# EAGLE board Papilio-Audio_Wing-Panel-v10 (EAGLE 6.3)
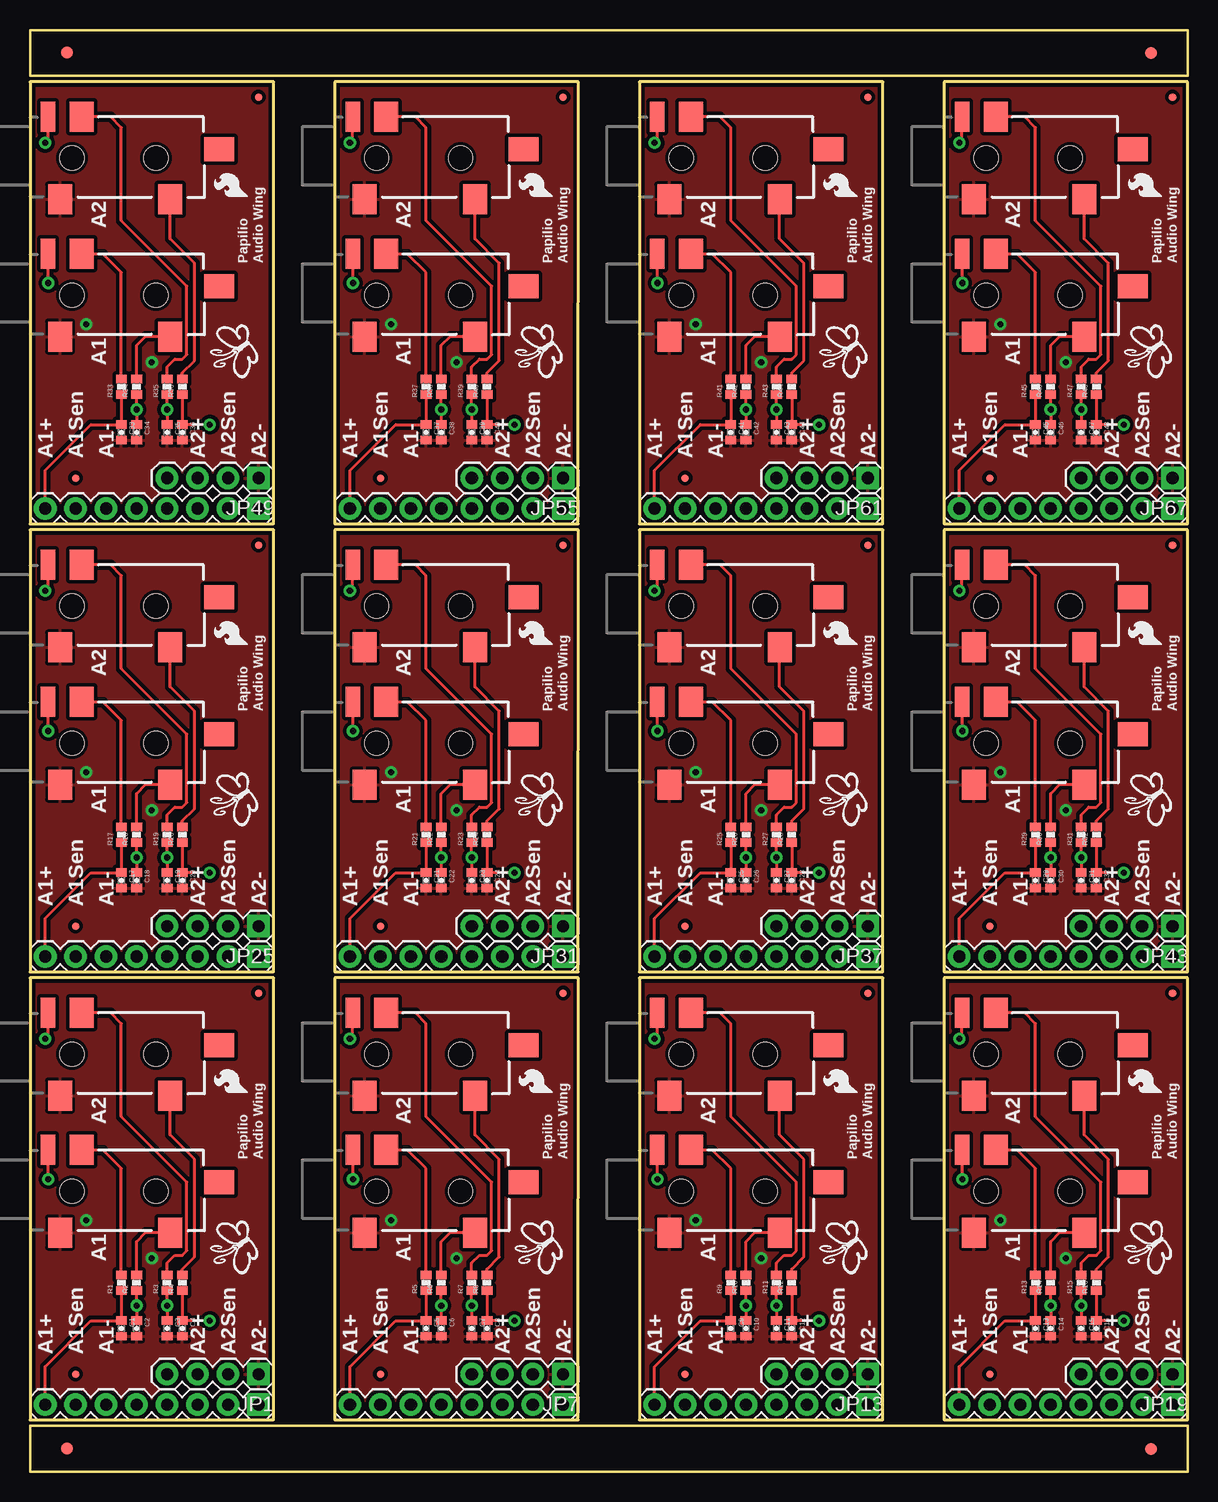
[diagram p0: board, top side]
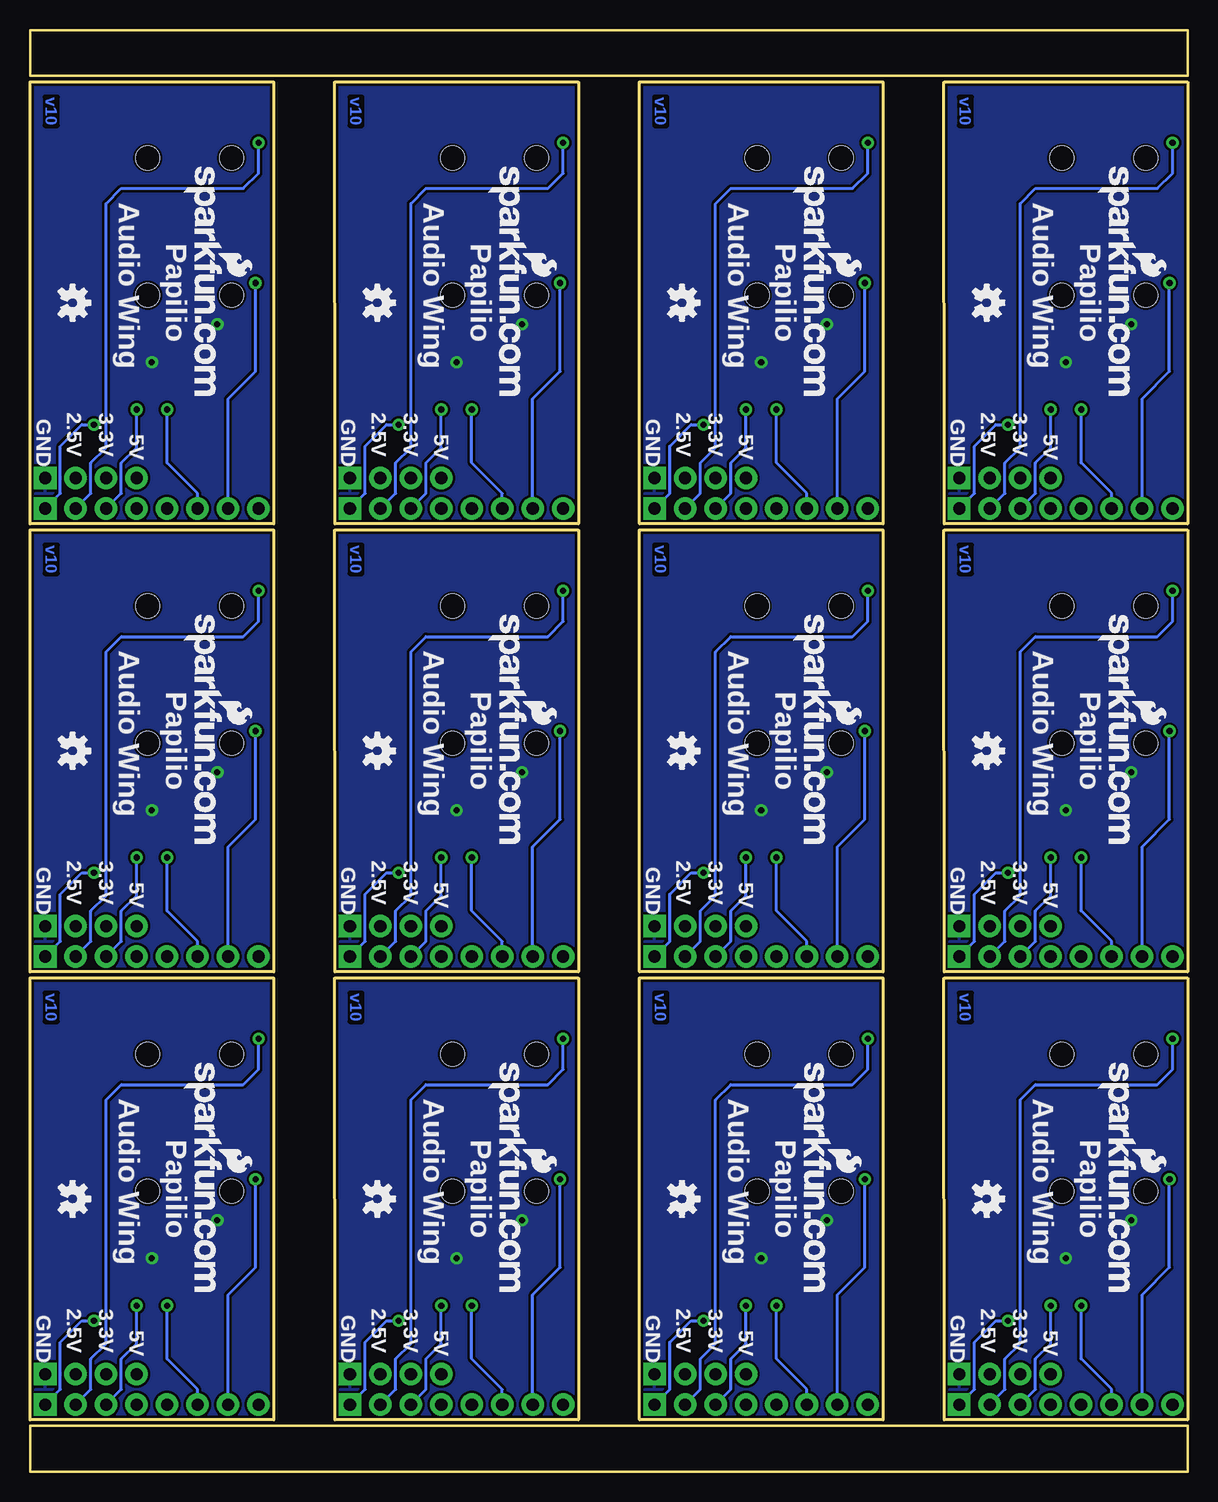
[diagram p1: board, bottom side, seen from below]

Size 96.52 x 120.14 mm. Coordinates in mm from the lower left corner, seen from the top.
Outline: 93.98,3.81 74.93,3.81
Outline: 74.93,3.81 7.62,3.81
Outline: 74.93,3.81 96.52,3.81 96.52,0 73.66,0
Outline: 2.54,0 21.59,0
Outline: 21.59,0 88.9,0
Outline: 21.59,0 0,0 0,3.81 22.86,3.81
Outline: 93.98,120.14 74.93,120.14
Outline: 74.93,120.14 7.62,120.14
Outline: 74.93,120.14 96.52,120.14 96.52,116.33 73.66,116.33
Outline: 2.54,116.33 21.59,116.33
Outline: 21.59,116.33 88.9,116.33
Outline: 21.59,116.33 0,116.33 0,120.14 22.86,120.14
Outline: 0,4.32 20.3,4.32 20.32,41.15 0,41.15 0,4.32
Outline: 25.4,4.32 45.7,4.32 45.72,41.15 25.4,41.15 25.4,4.32
Outline: 50.8,4.32 71.1,4.32 71.12,41.15 50.8,41.15 50.8,4.32
Outline: 76.2,4.32 96.5,4.32 96.52,41.15 76.2,41.15 76.2,4.32
Outline: 0,41.66 20.3,41.66 20.32,78.49 0,78.49 0,41.66
Outline: 25.4,41.66 45.7,41.66 45.72,78.49 25.4,78.49 25.4,41.66
Outline: 50.8,41.66 71.1,41.66 71.12,78.49 50.8,78.49 50.8,41.66
Outline: 76.2,41.66 96.5,41.66 96.52,78.49 76.2,78.49 76.2,41.66
Outline: 0,78.99 20.3,78.99 20.32,115.82 0,115.82 0,78.99
Outline: 25.4,78.99 45.7,78.99 45.72,115.82 25.4,115.82 25.4,78.99
Outline: 50.8,78.99 71.1,78.99 71.12,115.82 50.8,115.82 50.8,78.99
Outline: 76.2,78.99 96.5,78.99 96.52,115.82 76.2,115.82 76.2,78.99
Copper layers (1*16): Top 0.035mm / dielectric 1.5mm / Bottom 0.035mm
Design rules "default": minimum track width 8mil, minimum drill 20mil, track to track 8mil, track to pad 8mil, pad to pad 8mil, via to via 8mil, smd to smd 8mil, copper to edge 8mil, drill to drill 8mil, minimum pad ring 12mil, minimum via ring 10mil, stop-mask expansion 4mil, vias tented up to drill 20mil, thermal gap 10mil

## Footprints (pad centres in the part's own frame; a part is rotated, then mirrored left to right if it is on the bottom)
AUDIO-JACK-3.5MM-SMD = smd 2 x 2.5: RING 4.3,3.45; SLEEVE 2.5,-3.45; TIP 11.7,-3.45 | smd 1.2 x 2.5: RSH 1.5,3.45 | smd 2.5 x 2: TSH 15.75,0.75 | hole 2: 3.5,0; 10.5,0
0402-CAP = smd 0.7 x 0.9: 1 -0.65,0; 2 0.65,0
FIDUCIAL-1X2 = smd 1 x 1: 1 0,0
1X04 = drill 1.016 pad 1.88 square: 1 0,0 | drill 1.016 pad 1.88: 2 2.54,0; 3 5.08,0; 4 7.62,0
1X08 = drill 1.016 pad 1.88 square: 1 0,0 | drill 1.016 pad 1.88: 2 2.54,0; 3 5.08,0; 4 7.62,0; 5 10.16,0; 6 12.7,0; 7 15.24,0; 8 17.78,0
MICRO-FIDUCIAL = smd 0.635 x 0.635: 1 0,0
0402-RES = smd 0.7 x 0.9: 1 -0.65,0; 2 0.65,0

## Placement (x,y rotation side)
AJ1  AUDIO-JACK2SMD  [AUDIO-JACK-3.5MM-SMD]  0,23.37 0 top
AJ2  AUDIO-JACK2SMD  [AUDIO-JACK-3.5MM-SMD]  0,34.8 0 top
AJ3  AUDIO-JACK2SMD  [AUDIO-JACK-3.5MM-SMD]  25.4,23.37 0 top
AJ4  AUDIO-JACK2SMD  [AUDIO-JACK-3.5MM-SMD]  25.4,34.8 0 top
AJ5  AUDIO-JACK2SMD  [AUDIO-JACK-3.5MM-SMD]  50.8,23.37 0 top
AJ6  AUDIO-JACK2SMD  [AUDIO-JACK-3.5MM-SMD]  50.8,34.8 0 top
AJ7  AUDIO-JACK2SMD  [AUDIO-JACK-3.5MM-SMD]  76.2,23.37 0 top
AJ8  AUDIO-JACK2SMD  [AUDIO-JACK-3.5MM-SMD]  76.2,34.8 0 top
AJ9  AUDIO-JACK2SMD  [AUDIO-JACK-3.5MM-SMD]  0,60.71 0 top
AJ10  AUDIO-JACK2SMD  [AUDIO-JACK-3.5MM-SMD]  0,72.14 0 top
AJ11  AUDIO-JACK2SMD  [AUDIO-JACK-3.5MM-SMD]  25.4,60.71 0 top
AJ12  AUDIO-JACK2SMD  [AUDIO-JACK-3.5MM-SMD]  25.4,72.14 0 top
AJ13  AUDIO-JACK2SMD  [AUDIO-JACK-3.5MM-SMD]  50.8,60.71 0 top
AJ14  AUDIO-JACK2SMD  [AUDIO-JACK-3.5MM-SMD]  50.8,72.14 0 top
AJ15  AUDIO-JACK2SMD  [AUDIO-JACK-3.5MM-SMD]  76.2,60.71 0 top
AJ16  AUDIO-JACK2SMD  [AUDIO-JACK-3.5MM-SMD]  76.2,72.14 0 top
AJ17  AUDIO-JACK2SMD  [AUDIO-JACK-3.5MM-SMD]  0,98.04 0 top
AJ18  AUDIO-JACK2SMD  [AUDIO-JACK-3.5MM-SMD]  0,109.47 0 top
AJ19  AUDIO-JACK2SMD  [AUDIO-JACK-3.5MM-SMD]  25.4,98.04 0 top
AJ20  AUDIO-JACK2SMD  [AUDIO-JACK-3.5MM-SMD]  25.4,109.47 0 top
AJ21  AUDIO-JACK2SMD  [AUDIO-JACK-3.5MM-SMD]  50.8,98.04 0 top
AJ22  AUDIO-JACK2SMD  [AUDIO-JACK-3.5MM-SMD]  50.8,109.47 0 top
AJ23  AUDIO-JACK2SMD  [AUDIO-JACK-3.5MM-SMD]  76.2,98.04 0 top
AJ24  AUDIO-JACK2SMD  [AUDIO-JACK-3.5MM-SMD]  76.2,109.47 0 top
C1  4.7nF  [0402-CAP]  7.62,11.94 270 top
C2  4.7nF  [0402-CAP]  8.89,11.94 270 top
C3  4.7nF  [0402-CAP]  11.43,11.94 270 top
C4  4.7nF  [0402-CAP]  12.7,11.94 270 top
C5  4.7nF  [0402-CAP]  33.02,11.94 270 top
C6  4.7nF  [0402-CAP]  34.29,11.94 270 top
C7  4.7nF  [0402-CAP]  36.83,11.94 270 top
C8  4.7nF  [0402-CAP]  38.1,11.94 270 top
C9  4.7nF  [0402-CAP]  58.42,11.94 270 top
C10  4.7nF  [0402-CAP]  59.69,11.94 270 top
C11  4.7nF  [0402-CAP]  62.23,11.94 270 top
C12  4.7nF  [0402-CAP]  63.5,11.94 270 top
C13  4.7nF  [0402-CAP]  83.82,11.94 270 top
C14  4.7nF  [0402-CAP]  85.09,11.94 270 top
C15  4.7nF  [0402-CAP]  87.63,11.94 270 top
C16  4.7nF  [0402-CAP]  88.9,11.94 270 top
C17  4.7nF  [0402-CAP]  7.62,49.28 270 top
C18  4.7nF  [0402-CAP]  8.89,49.28 270 top
C19  4.7nF  [0402-CAP]  11.43,49.28 270 top
C20  4.7nF  [0402-CAP]  12.7,49.28 270 top
C21  4.7nF  [0402-CAP]  33.02,49.28 270 top
C22  4.7nF  [0402-CAP]  34.29,49.28 270 top
C23  4.7nF  [0402-CAP]  36.83,49.28 270 top
C24  4.7nF  [0402-CAP]  38.1,49.28 270 top
C25  4.7nF  [0402-CAP]  58.42,49.28 270 top
C26  4.7nF  [0402-CAP]  59.69,49.28 270 top
C27  4.7nF  [0402-CAP]  62.23,49.28 270 top
C28  4.7nF  [0402-CAP]  63.5,49.28 270 top
C29  4.7nF  [0402-CAP]  83.82,49.28 270 top
C30  4.7nF  [0402-CAP]  85.09,49.28 270 top
C31  4.7nF  [0402-CAP]  87.63,49.28 270 top
C32  4.7nF  [0402-CAP]  88.9,49.28 270 top
C33  4.7nF  [0402-CAP]  7.62,86.61 270 top
C34  4.7nF  [0402-CAP]  8.89,86.61 270 top
C35  4.7nF  [0402-CAP]  11.43,86.61 270 top
C36  4.7nF  [0402-CAP]  12.7,86.61 270 top
C37  4.7nF  [0402-CAP]  33.02,86.61 270 top
C38  4.7nF  [0402-CAP]  34.29,86.61 270 top
C39  4.7nF  [0402-CAP]  36.83,86.61 270 top
C40  4.7nF  [0402-CAP]  38.1,86.61 270 top
C41  4.7nF  [0402-CAP]  58.42,86.61 270 top
C42  4.7nF  [0402-CAP]  59.69,86.61 270 top
C43  4.7nF  [0402-CAP]  62.23,86.61 270 top
C44  4.7nF  [0402-CAP]  63.5,86.61 270 top
C45  4.7nF  [0402-CAP]  83.82,86.61 270 top
C46  4.7nF  [0402-CAP]  85.09,86.61 270 top
C47  4.7nF  [0402-CAP]  87.63,86.61 270 top
C48  4.7nF  [0402-CAP]  88.9,86.61 270 top
E$1  [FIDUCIAL-1X2]  3.07,1.93 90 top
E$2  [FIDUCIAL-1X2]  93.45,1.88 270 top
E$3  [FIDUCIAL-1X2]  93.45,118.21 270 top
E$4  [FIDUCIAL-1X2]  3.07,118.26 90 top
JP1  [1X04]  19.05,8.13 180 top
JP2  [1X08]  19.05,5.59 180 top
JP3  LOGO-SFESK  [SFE-LOGO-FLAME]  18.16,31.62 90 top
JP4  LOGO-SFENEW  [SFE-NEW-WEBLOGO]  7.49,34.04 270 bottom
JP5  FIDUCIALUFIDUCIAL  [MICRO-FIDUCIAL]  3.81,8.13 0 top
JP6  FIDUCIALUFIDUCIAL  [MICRO-FIDUCIAL]  19.05,39.88 0 top
JP7  [1X04]  44.45,8.13 180 top
JP8  [1X08]  44.45,5.59 180 top
JP9  LOGO-SFESK  [SFE-LOGO-FLAME]  43.56,31.62 90 top
JP10  LOGO-SFENEW  [SFE-NEW-WEBLOGO]  32.89,34.04 270 bottom
JP11  FIDUCIALUFIDUCIAL  [MICRO-FIDUCIAL]  29.21,8.13 0 top
JP12  FIDUCIALUFIDUCIAL  [MICRO-FIDUCIAL]  44.45,39.88 0 top
JP13  [1X04]  69.85,8.13 180 top
JP14  [1X08]  69.85,5.59 180 top
JP15  LOGO-SFESK  [SFE-LOGO-FLAME]  68.96,31.62 90 top
JP16  LOGO-SFENEW  [SFE-NEW-WEBLOGO]  58.29,34.04 270 bottom
JP17  FIDUCIALUFIDUCIAL  [MICRO-FIDUCIAL]  54.61,8.13 0 top
JP18  FIDUCIALUFIDUCIAL  [MICRO-FIDUCIAL]  69.85,39.88 0 top
JP19  [1X04]  95.25,8.13 180 top
JP20  [1X08]  95.25,5.59 180 top
JP21  LOGO-SFESK  [SFE-LOGO-FLAME]  94.36,31.62 90 top
JP22  LOGO-SFENEW  [SFE-NEW-WEBLOGO]  83.69,34.04 270 bottom
JP23  FIDUCIALUFIDUCIAL  [MICRO-FIDUCIAL]  80.01,8.13 0 top
JP24  FIDUCIALUFIDUCIAL  [MICRO-FIDUCIAL]  95.25,39.88 0 top
JP25  [1X04]  19.05,45.47 180 top
JP26  [1X08]  19.05,42.93 180 top
JP27  LOGO-SFESK  [SFE-LOGO-FLAME]  18.16,68.96 90 top
JP28  LOGO-SFENEW  [SFE-NEW-WEBLOGO]  7.49,71.37 270 bottom
JP29  FIDUCIALUFIDUCIAL  [MICRO-FIDUCIAL]  3.81,45.47 0 top
JP30  FIDUCIALUFIDUCIAL  [MICRO-FIDUCIAL]  19.05,77.22 0 top
JP31  [1X04]  44.45,45.47 180 top
JP32  [1X08]  44.45,42.93 180 top
JP33  LOGO-SFESK  [SFE-LOGO-FLAME]  43.56,68.96 90 top
JP34  LOGO-SFENEW  [SFE-NEW-WEBLOGO]  32.89,71.37 270 bottom
JP35  FIDUCIALUFIDUCIAL  [MICRO-FIDUCIAL]  29.21,45.47 0 top
JP36  FIDUCIALUFIDUCIAL  [MICRO-FIDUCIAL]  44.45,77.22 0 top
JP37  [1X04]  69.85,45.47 180 top
JP38  [1X08]  69.85,42.93 180 top
JP39  LOGO-SFESK  [SFE-LOGO-FLAME]  68.96,68.96 90 top
JP40  LOGO-SFENEW  [SFE-NEW-WEBLOGO]  58.29,71.37 270 bottom
JP41  FIDUCIALUFIDUCIAL  [MICRO-FIDUCIAL]  54.61,45.47 0 top
JP42  FIDUCIALUFIDUCIAL  [MICRO-FIDUCIAL]  69.85,77.22 0 top
JP43  [1X04]  95.25,45.47 180 top
JP44  [1X08]  95.25,42.93 180 top
JP45  LOGO-SFESK  [SFE-LOGO-FLAME]  94.36,68.96 90 top
JP46  LOGO-SFENEW  [SFE-NEW-WEBLOGO]  83.69,71.37 270 bottom
JP47  FIDUCIALUFIDUCIAL  [MICRO-FIDUCIAL]  80.01,45.47 0 top
JP48  FIDUCIALUFIDUCIAL  [MICRO-FIDUCIAL]  95.25,77.22 0 top
JP49  [1X04]  19.05,82.8 180 top
JP50  [1X08]  19.05,80.26 180 top
JP51  LOGO-SFESK  [SFE-LOGO-FLAME]  18.16,106.3 90 top
JP52  LOGO-SFENEW  [SFE-NEW-WEBLOGO]  7.49,108.71 270 bottom
JP53  FIDUCIALUFIDUCIAL  [MICRO-FIDUCIAL]  3.81,82.8 0 top
JP54  FIDUCIALUFIDUCIAL  [MICRO-FIDUCIAL]  19.05,114.55 0 top
JP55  [1X04]  44.45,82.8 180 top
JP56  [1X08]  44.45,80.26 180 top
JP57  LOGO-SFESK  [SFE-LOGO-FLAME]  43.56,106.3 90 top
JP58  LOGO-SFENEW  [SFE-NEW-WEBLOGO]  32.89,108.71 270 bottom
JP59  FIDUCIALUFIDUCIAL  [MICRO-FIDUCIAL]  29.21,82.8 0 top
JP60  FIDUCIALUFIDUCIAL  [MICRO-FIDUCIAL]  44.45,114.55 0 top
JP61  [1X04]  69.85,82.8 180 top
JP62  [1X08]  69.85,80.26 180 top
JP63  LOGO-SFESK  [SFE-LOGO-FLAME]  68.96,106.3 90 top
JP64  LOGO-SFENEW  [SFE-NEW-WEBLOGO]  58.29,108.71 270 bottom
JP65  FIDUCIALUFIDUCIAL  [MICRO-FIDUCIAL]  54.61,82.8 0 top
JP66  FIDUCIALUFIDUCIAL  [MICRO-FIDUCIAL]  69.85,114.55 0 top
JP67  [1X04]  95.25,82.8 180 top
JP68  [1X08]  95.25,80.26 180 top
JP69  LOGO-SFESK  [SFE-LOGO-FLAME]  94.36,106.3 90 top
JP70  LOGO-SFENEW  [SFE-NEW-WEBLOGO]  83.69,108.71 270 bottom
JP71  FIDUCIALUFIDUCIAL  [MICRO-FIDUCIAL]  80.01,82.8 0 top
JP72  FIDUCIALUFIDUCIAL  [MICRO-FIDUCIAL]  95.25,114.55 0 top
R1  3.3k  [0402-RES]  7.62,15.75 90 top
R2  3.3k  [0402-RES]  8.89,15.75 90 top
R3  3.3k  [0402-RES]  11.43,15.75 90 top
R4  3.3k  [0402-RES]  12.7,15.75 90 top
R5  3.3k  [0402-RES]  33.02,15.75 90 top
R6  3.3k  [0402-RES]  34.29,15.75 90 top
R7  3.3k  [0402-RES]  36.83,15.75 90 top
R8  3.3k  [0402-RES]  38.1,15.75 90 top
R9  3.3k  [0402-RES]  58.42,15.75 90 top
R10  3.3k  [0402-RES]  59.69,15.75 90 top
R11  3.3k  [0402-RES]  62.23,15.75 90 top
R12  3.3k  [0402-RES]  63.5,15.75 90 top
R13  3.3k  [0402-RES]  83.82,15.75 90 top
R14  3.3k  [0402-RES]  85.09,15.75 90 top
R15  3.3k  [0402-RES]  87.63,15.75 90 top
R16  3.3k  [0402-RES]  88.9,15.75 90 top
R17  3.3k  [0402-RES]  7.62,53.09 90 top
R18  3.3k  [0402-RES]  8.89,53.09 90 top
R19  3.3k  [0402-RES]  11.43,53.09 90 top
R20  3.3k  [0402-RES]  12.7,53.09 90 top
R21  3.3k  [0402-RES]  33.02,53.09 90 top
R22  3.3k  [0402-RES]  34.29,53.09 90 top
R23  3.3k  [0402-RES]  36.83,53.09 90 top
R24  3.3k  [0402-RES]  38.1,53.09 90 top
R25  3.3k  [0402-RES]  58.42,53.09 90 top
R26  3.3k  [0402-RES]  59.69,53.09 90 top
R27  3.3k  [0402-RES]  62.23,53.09 90 top
R28  3.3k  [0402-RES]  63.5,53.09 90 top
R29  3.3k  [0402-RES]  83.82,53.09 90 top
R30  3.3k  [0402-RES]  85.09,53.09 90 top
R31  3.3k  [0402-RES]  87.63,53.09 90 top
R32  3.3k  [0402-RES]  88.9,53.09 90 top
R33  3.3k  [0402-RES]  7.62,90.42 90 top
R34  3.3k  [0402-RES]  8.89,90.42 90 top
R35  3.3k  [0402-RES]  11.43,90.42 90 top
R36  3.3k  [0402-RES]  12.7,90.42 90 top
R37  3.3k  [0402-RES]  33.02,90.42 90 top
R38  3.3k  [0402-RES]  34.29,90.42 90 top
R39  3.3k  [0402-RES]  36.83,90.42 90 top
R40  3.3k  [0402-RES]  38.1,90.42 90 top
R41  3.3k  [0402-RES]  58.42,90.42 90 top
R42  3.3k  [0402-RES]  59.69,90.42 90 top
R43  3.3k  [0402-RES]  62.23,90.42 90 top
R44  3.3k  [0402-RES]  63.5,90.42 90 top
R45  3.3k  [0402-RES]  83.82,90.42 90 top
R46  3.3k  [0402-RES]  85.09,90.42 90 top
R47  3.3k  [0402-RES]  87.63,90.42 90 top
R48  3.3k  [0402-RES]  88.9,90.42 90 top
U$1  OSHW-LOGOS  [OSHW-LOGO-S]  16.76,22.73 270 bottom
U$2  OSHW-LOGOS  [OSHW-LOGO-S]  42.16,22.73 270 bottom
U$3  OSHW-LOGOS  [OSHW-LOGO-S]  67.56,22.73 270 bottom
U$4  OSHW-LOGOS  [OSHW-LOGO-S]  92.96,22.73 270 bottom
U$5  OSHW-LOGOS  [OSHW-LOGO-S]  16.76,60.07 270 bottom
U$6  OSHW-LOGOS  [OSHW-LOGO-S]  42.16,60.07 270 bottom
U$7  OSHW-LOGOS  [OSHW-LOGO-S]  67.56,60.07 270 bottom
U$8  OSHW-LOGOS  [OSHW-LOGO-S]  92.96,60.07 270 bottom
U$9  OSHW-LOGOS  [OSHW-LOGO-S]  16.76,97.41 270 bottom
U$10  OSHW-LOGOS  [OSHW-LOGO-S]  42.16,97.41 270 bottom
U$11  OSHW-LOGOS  [OSHW-LOGO-S]  67.56,97.41 270 bottom
U$12  OSHW-LOGOS  [OSHW-LOGO-S]  92.96,97.41 270 bottom

## Library data of the parts
AJ1-AJ24 JP1 JP2 JP7 JP8 JP13 JP14 JP19 JP20 JP25 JP26 JP31 JP32 JP37 JP38 JP43 JP44 JP49 JP50 JP55 JP56 JP61 JP62 JP67 JP68 = SparkFun-Connectors
C1-C48 R1-R48 = SparkFun-Passives
E$1-E$4 JP5 JP6 JP11 JP12 JP17 JP18 JP23 JP24 JP29 JP30 JP35 JP36 JP41 JP42 JP47 JP48 JP53 JP54 JP59 JP60 JP65 JP66 JP71 JP72 = SparkFun
JP3 JP4 JP9 JP10 JP15 JP16 JP21 JP22 JP27 JP28 JP33 JP34 JP39 JP40 JP45 JP46 JP51 JP52 JP57 JP58 JP63 JP64 JP69 JP70 U$1-U$12 = SparkFun-Aesthetics

## Nets
3.3V: JP1.3
3.3V1: JP7.3
3.3V2: JP13.3
3.3V3: JP19.3
3.3V4: JP25.3
3.3V5: JP31.3
3.3V6: JP37.3
3.3V7: JP43.3
3.3V8: JP49.3
3.3V9: JP55.3
3.3V10: JP61.3
3.3V11: JP67.3
A1+: C1.1 JP2.8 R1.1
A1+1: C5.1 JP8.8 R5.1
A1+2: C9.1 JP14.8 R9.1
A1+3: C13.1 JP20.8 R13.1
A1+4: C17.1 JP26.8 R17.1
A1+5: C21.1 JP32.8 R21.1
A1+6: C25.1 JP38.8 R25.1
A1+7: C29.1 JP44.8 R29.1
A1+8: C33.1 JP50.8 R33.1
A1+9: C37.1 JP56.8 R37.1
A1+10: C41.1 JP62.8 R41.1
A1+11: C45.1 JP68.8 R45.1
A1-: C2.1 JP2.6 R2.1
A1-1: C6.1 JP8.6 R6.1
A1-2: C10.1 JP14.6 R10.1
A1-3: C14.1 JP20.6 R14.1
A1-4: C18.1 JP26.6 R18.1
A1-5: C22.1 JP32.6 R22.1
A1-6: C26.1 JP38.6 R26.1
A1-7: C30.1 JP44.6 R30.1
A1-8: C34.1 JP50.6 R34.1
A1-9: C38.1 JP56.6 R38.1
A1-10: C42.1 JP62.6 R42.1
A1-11: C46.1 JP68.6 R46.1
A1SEN: AJ1.RSH JP2.7
A1SEN1: AJ3.RSH JP8.7
A1SEN2: AJ5.RSH JP14.7
A1SEN3: AJ7.RSH JP20.7
A1SEN4: AJ9.RSH JP26.7
A1SEN5: AJ11.RSH JP32.7
A1SEN6: AJ13.RSH JP38.7
A1SEN7: AJ15.RSH JP44.7
A1SEN8: AJ17.RSH JP50.7
A1SEN9: AJ19.RSH JP56.7
A1SEN10: AJ21.RSH JP62.7
A1SEN11: AJ23.RSH JP68.7
A2+: C3.1 JP2.3 R3.1
A2+1: C7.1 JP8.3 R7.1
A2+2: C11.1 JP14.3 R11.1
A2+3: C15.1 JP20.3 R15.1
A2+4: C19.1 JP26.3 R19.1
A2+5: C23.1 JP32.3 R23.1
A2+6: C27.1 JP38.3 R27.1
A2+7: C31.1 JP44.3 R31.1
A2+8: C35.1 JP50.3 R35.1
A2+9: C39.1 JP56.3 R39.1
A2+10: C43.1 JP62.3 R43.1
A2+11: C47.1 JP68.3 R47.1
A2-: C4.1 JP2.1 R4.1
A2-1: C8.1 JP8.1 R8.1
A2-2: C12.1 JP14.1 R12.1
A2-3: C16.1 JP20.1 R16.1
A2-4: C20.1 JP26.1 R20.1
A2-5: C24.1 JP32.1 R24.1
A2-6: C28.1 JP38.1 R28.1
A2-7: C32.1 JP44.1 R32.1
A2-8: C36.1 JP50.1 R36.1
A2-9: C40.1 JP56.1 R40.1
A2-10: C44.1 JP62.1 R44.1
A2-11: C48.1 JP68.1 R48.1
A2SEN: AJ2.RSH JP2.2
A2SEN1: AJ4.RSH JP8.2
A2SEN2: AJ6.RSH JP14.2
A2SEN3: AJ8.RSH JP20.2
A2SEN4: AJ10.RSH JP26.2
A2SEN5: AJ12.RSH JP32.2
A2SEN6: AJ14.RSH JP38.2
A2SEN7: AJ16.RSH JP44.2
A2SEN8: AJ18.RSH JP50.2
A2SEN9: AJ20.RSH JP56.2
A2SEN10: AJ22.RSH JP62.2
A2SEN11: AJ24.RSH JP68.2
GND: AJ1.SLEEVE AJ2.SLEEVE C1.2 C2.2 C3.2 C4.2 JP1.1
GND1: AJ3.SLEEVE AJ4.SLEEVE C5.2 C6.2 C7.2 C8.2 JP7.1
GND2: AJ5.SLEEVE AJ6.SLEEVE C9.2 C10.2 C11.2 C12.2 JP13.1
GND3: AJ7.SLEEVE AJ8.SLEEVE C13.2 C14.2 C15.2 C16.2 JP19.1
GND4: AJ9.SLEEVE AJ10.SLEEVE C17.2 C18.2 C19.2 C20.2 JP25.1
GND5: AJ11.SLEEVE AJ12.SLEEVE C21.2 C22.2 C23.2 C24.2 JP31.1
GND6: AJ13.SLEEVE AJ14.SLEEVE C25.2 C26.2 C27.2 C28.2 JP37.1
GND7: AJ15.SLEEVE AJ16.SLEEVE C29.2 C30.2 C31.2 C32.2 JP43.1
GND8: AJ17.SLEEVE AJ18.SLEEVE C33.2 C34.2 C35.2 C36.2 JP49.1
GND9: AJ19.SLEEVE AJ20.SLEEVE C37.2 C38.2 C39.2 C40.2 JP55.1
GND10: AJ21.SLEEVE AJ22.SLEEVE C41.2 C42.2 C43.2 C44.2 JP61.1
GND11: AJ23.SLEEVE AJ24.SLEEVE C45.2 C46.2 C47.2 C48.2 JP67.1
N$1: AJ2.RING R3.2
N$2: AJ2.TIP R4.2
N$3: AJ1.RING R1.2
N$4: AJ1.TIP R2.2
N$5: AJ4.RING R7.2
N$6: AJ4.TIP R8.2
N$7: AJ3.RING R5.2
N$8: AJ3.TIP R6.2
N$9: AJ6.RING R11.2
N$10: AJ6.TIP R12.2
N$11: AJ5.RING R9.2
N$12: AJ5.TIP R10.2
N$13: AJ8.RING R15.2
N$14: AJ8.TIP R16.2
N$15: AJ7.RING R13.2
N$16: AJ7.TIP R14.2
N$17: AJ10.RING R19.2
N$18: AJ10.TIP R20.2
N$19: AJ9.RING R17.2
N$20: AJ9.TIP R18.2
N$21: AJ12.RING R23.2
N$22: AJ12.TIP R24.2
N$23: AJ11.RING R21.2
N$24: AJ11.TIP R22.2
N$25: AJ14.RING R27.2
N$26: AJ14.TIP R28.2
N$27: AJ13.RING R25.2
N$28: AJ13.TIP R26.2
N$29: AJ16.RING R31.2
N$30: AJ16.TIP R32.2
N$31: AJ15.RING R29.2
N$32: AJ15.TIP R30.2
N$33: AJ18.RING R35.2
N$34: AJ18.TIP R36.2
N$35: AJ17.RING R33.2
N$36: AJ17.TIP R34.2
N$37: AJ20.RING R39.2
N$38: AJ20.TIP R40.2
N$39: AJ19.RING R37.2
N$40: AJ19.TIP R38.2
N$41: AJ22.RING R43.2
N$42: AJ22.TIP R44.2
N$43: AJ21.RING R41.2
N$44: AJ21.TIP R42.2
N$45: AJ24.RING R47.2
N$46: AJ24.TIP R48.2
N$47: AJ23.RING R45.2
N$48: AJ23.TIP R46.2

## Tracks (layer width: path | path; a pad name or v marks a point on that pad's centre or on a via)
A1+
  Top 0.254: JP2.8 1.27,8.76 5.08,12.57 7.61,12.57 C1.1 R1.1
A1+1
  Top 0.254: JP8.8 26.67,8.76 30.48,12.57 33.01,12.57 C5.1 R5.1
A1+2
  Top 0.254: JP14.8 52.07,8.76 55.88,12.57 58.41,12.57 C9.1 R9.1
A1+3
  Top 0.254: JP20.8 77.47,8.76 81.28,12.57 83.81,12.57 C13.1 R13.1
A1+4
  Top 0.254: JP26.8 1.27,46.1 5.08,49.91 7.61,49.91 C17.1 R17.1
A1+5
  Top 0.254: JP32.8 26.67,46.1 30.48,49.91 33.01,49.91 C21.1 R21.1
A1+6
  Top 0.254: JP38.8 52.07,46.1 55.88,49.91 58.41,49.91 C25.1 R25.1
A1+7
  Top 0.254: JP44.8 77.47,46.1 81.28,49.91 83.81,49.91 C29.1 R29.1
A1+8
  Top 0.254: JP50.8 1.27,83.44 5.08,87.25 7.61,87.25 C33.1 R33.1
A1+9
  Top 0.254: JP56.8 26.67,83.44 30.48,87.25 33.01,87.25 C37.1 R37.1
A1+10
  Top 0.254: JP62.8 52.07,83.44 55.88,87.25 58.41,87.25 C41.1 R41.1
A1+11
  Top 0.254: JP68.8 77.47,83.44 81.28,87.25 83.81,87.25 C45.1 R45.1
A1-  (via drill 0.51)
  Top 0.254: R2.1 v8.89,13.84 C2.1
  Bottom 0.254: JP2.6 6.35,6.86 8.89,9.4 v8.89,13.84
A1-1  (via drill 0.51)
  Top 0.254: R6.1 v34.29,13.84 C6.1
  Bottom 0.254: JP8.6 31.75,6.86 34.29,9.4 v34.29,13.84
A1-2  (via drill 0.51)
  Top 0.254: R10.1 v59.69,13.84 C10.1
  Bottom 0.254: JP14.6 57.15,6.86 59.69,9.4 v59.69,13.84
A1-3  (via drill 0.51)
  Top 0.254: R14.1 v85.09,13.84 C14.1
  Bottom 0.254: JP20.6 82.55,6.86 85.09,9.4 v85.09,13.84
A1-4  (via drill 0.51)
  Top 0.254: R18.1 v8.89,51.18 C18.1
  Bottom 0.254: JP26.6 6.35,44.2 8.89,46.74 v8.89,51.18
A1-5  (via drill 0.51)
  Top 0.254: R22.1 v34.29,51.18 C22.1
  Bottom 0.254: JP32.6 31.75,44.2 34.29,46.74 v34.29,51.18
A1-6  (via drill 0.51)
  Top 0.254: R26.1 v59.69,51.18 C26.1
  Bottom 0.254: JP38.6 57.15,44.2 59.69,46.74 v59.69,51.18
A1-7  (via drill 0.51)
  Top 0.254: R30.1 v85.09,51.18 C30.1
  Bottom 0.254: JP44.6 82.55,44.2 85.09,46.74 v85.09,51.18
A1-8  (via drill 0.51)
  Top 0.254: R34.1 v8.89,88.52 C34.1
  Bottom 0.254: JP50.6 6.35,81.53 8.89,84.07 v8.89,88.52
A1-9  (via drill 0.51)
  Top 0.254: R38.1 v34.29,88.52 C38.1
  Bottom 0.254: JP56.6 31.75,81.53 34.29,84.07 v34.29,88.52
A1-10  (via drill 0.51)
  Top 0.254: R42.1 v59.69,88.52 C42.1
  Bottom 0.254: JP62.6 57.15,81.53 59.69,84.07 v59.69,88.52
A1-11  (via drill 0.51)
  Top 0.254: R46.1 v85.09,88.52 C46.1
  Bottom 0.254: JP68.6 82.55,81.53 85.09,84.07 v85.09,88.52
A1SEN  (via drill 0.51)
  Top 0.254: v1.52,24.38 1.52,26.79 AJ1.RSH
  Bottom 0.254: JP2.7 3.81,14.73 1.52,17.02 v1.52,24.38
A1SEN1  (via drill 0.51)
  Top 0.254: v26.92,24.38 26.92,26.79 AJ3.RSH
  Bottom 0.254: JP8.7 29.21,14.73 26.92,17.02 v26.92,24.38
A1SEN2  (via drill 0.51)
  Top 0.254: v52.32,24.38 52.32,26.79 AJ5.RSH
  Bottom 0.254: JP14.7 54.61,14.73 52.32,17.02 v52.32,24.38
A1SEN3  (via drill 0.51)
  Top 0.254: v77.72,24.38 77.72,26.79 AJ7.RSH
  Bottom 0.254: JP20.7 80.01,14.73 77.72,17.02 v77.72,24.38
A1SEN4  (via drill 0.51)
  Top 0.254: v1.52,61.72 1.52,64.13 AJ9.RSH
  Bottom 0.254: JP26.7 3.81,52.07 1.52,54.36 v1.52,61.72
A1SEN5  (via drill 0.51)
  Top 0.254: v26.92,61.72 26.92,64.13 AJ11.RSH
  Bottom 0.254: JP32.7 29.21,52.07 26.92,54.36 v26.92,61.72
A1SEN6  (via drill 0.51)
  Top 0.254: v52.32,61.72 52.32,64.13 AJ13.RSH
  Bottom 0.254: JP38.7 54.61,52.07 52.32,54.36 v52.32,61.72
A1SEN7  (via drill 0.51)
  Top 0.254: v77.72,61.72 77.72,64.13 AJ15.RSH
  Bottom 0.254: JP44.7 80.01,52.07 77.72,54.36 v77.72,61.72
A1SEN8  (via drill 0.51)
  Top 0.254: v1.52,99.06 1.52,101.47 AJ17.RSH
  Bottom 0.254: JP50.7 3.81,89.41 1.52,91.69 v1.52,99.06
A1SEN9  (via drill 0.51)
  Top 0.254: v26.92,99.06 26.92,101.47 AJ19.RSH
  Bottom 0.254: JP56.7 29.21,89.41 26.92,91.69 v26.92,99.06
A1SEN10  (via drill 0.51)
  Top 0.254: v52.32,99.06 52.32,101.47 AJ21.RSH
  Bottom 0.254: JP62.7 54.61,89.41 52.32,91.69 v52.32,99.06
A1SEN11  (via drill 0.51)
  Top 0.254: v77.72,99.06 77.72,101.47 AJ23.RSH
  Bottom 0.254: JP68.7 80.01,89.41 77.72,91.69 v77.72,99.06
A2+  (via drill 0.51)
  Top 0.254: R3.1 v11.43,13.84 C3.1
  Bottom 0.254: JP2.3 12.7,6.86 12.7,9.4 11.43,10.67 v11.43,13.84
A2+1  (via drill 0.51)
  Top 0.254: R7.1 v36.83,13.84 C7.1
  Bottom 0.254: JP8.3 38.1,6.86 38.1,9.4 36.83,10.67 v36.83,13.84
A2+2  (via drill 0.51)
  Top 0.254: R11.1 v62.23,13.84 C11.1
  Bottom 0.254: JP14.3 63.5,6.86 63.5,9.4 62.23,10.67 v62.23,13.84
A2+3  (via drill 0.51)
  Top 0.254: R15.1 v87.63,13.84 C15.1
  Bottom 0.254: JP20.3 88.9,6.86 88.9,9.4 87.63,10.67 v87.63,13.84
A2+4  (via drill 0.51)
  Top 0.254: R19.1 v11.43,51.18 C19.1
  Bottom 0.254: JP26.3 12.7,44.2 12.7,46.74 11.43,48.01 v11.43,51.18
A2+5  (via drill 0.51)
  Top 0.254: R23.1 v36.83,51.18 C23.1
  Bottom 0.254: JP32.3 38.1,44.2 38.1,46.74 36.83,48.01 v36.83,51.18
A2+6  (via drill 0.51)
  Top 0.254: R27.1 v62.23,51.18 C27.1
  Bottom 0.254: JP38.3 63.5,44.2 63.5,46.74 62.23,48.01 v62.23,51.18
A2+7  (via drill 0.51)
  Top 0.254: R31.1 v87.63,51.18 C31.1
  Bottom 0.254: JP44.3 88.9,44.2 88.9,46.74 87.63,48.01 v87.63,51.18
A2+8  (via drill 0.51)
  Top 0.254: R35.1 v11.43,88.52 C35.1
  Bottom 0.254: JP50.3 12.7,81.53 12.7,84.07 11.43,85.34 v11.43,88.52
A2+9  (via drill 0.51)
  Top 0.254: R39.1 v36.83,88.52 C39.1
  Bottom 0.254: JP56.3 38.1,81.53 38.1,84.07 36.83,85.34 v36.83,88.52
A2+10  (via drill 0.51)
  Top 0.254: R43.1 v62.23,88.52 C43.1
  Bottom 0.254: JP62.3 63.5,81.53 63.5,84.07 62.23,85.34 v62.23,88.52
A2+11  (via drill 0.51)
  Top 0.254: R47.1 v87.63,88.52 C47.1
  Bottom 0.254: JP68.3 88.9,81.53 88.9,84.07 87.63,85.34 v87.63,88.52
A2-  (via drill 0.51)
  Top 0.254: R4.1 C4.1 12.71,12.57 v14.99,12.57
  Bottom 0.254: JP2.1 17.78,6.86 17.78,10.79 16,12.57 v14.99,12.57
A2-1  (via drill 0.51)
  Top 0.254: R8.1 C8.1 38.12,12.57 v40.39,12.57
  Bottom 0.254: JP8.1 43.18,6.86 43.18,10.79 41.4,12.57 v40.39,12.57
A2-2  (via drill 0.51)
  Top 0.254: R12.1 C12.1 63.52,12.57 v65.79,12.57
  Bottom 0.254: JP14.1 68.58,6.86 68.58,10.79 66.8,12.57 v65.79,12.57
A2-3  (via drill 0.51)
  Top 0.254: R16.1 C16.1 88.92,12.57 v91.19,12.57
  Bottom 0.254: JP20.1 93.98,6.86 93.98,10.79 92.2,12.57 v91.19,12.57
A2-4  (via drill 0.51)
  Top 0.254: R20.1 C20.1 12.71,49.91 v14.99,49.91
  Bottom 0.254: JP26.1 17.78,44.2 17.78,48.13 16,49.91 v14.99,49.91
A2-5  (via drill 0.51)
  Top 0.254: R24.1 C24.1 38.12,49.91 v40.39,49.91
  Bottom 0.254: JP32.1 43.18,44.2 43.18,48.13 41.4,49.91 v40.39,49.91
A2-6  (via drill 0.51)
  Top 0.254: R28.1 C28.1 63.52,49.91 v65.79,49.91
  Bottom 0.254: JP38.1 68.58,44.2 68.58,48.13 66.8,49.91 v65.79,49.91
A2-7  (via drill 0.51)
  Top 0.254: R32.1 C32.1 88.92,49.91 v91.19,49.91
  Bottom 0.254: JP44.1 93.98,44.2 93.98,48.13 92.2,49.91 v91.19,49.91
A2-8  (via drill 0.51)
  Top 0.254: R36.1 C36.1 12.71,87.25 v14.99,87.25
  Bottom 0.254: JP50.1 17.78,81.53 17.78,85.47 16,87.25 v14.99,87.25
A2-9  (via drill 0.51)
  Top 0.254: R40.1 C40.1 38.12,87.25 v40.39,87.25
  Bottom 0.254: JP56.1 43.18,81.53 43.18,85.47 41.4,87.25 v40.39,87.25
A2-10  (via drill 0.51)
  Top 0.254: R44.1 C44.1 63.52,87.25 v65.79,87.25
  Bottom 0.254: JP62.1 68.58,81.53 68.58,85.47 66.8,87.25 v65.79,87.25
A2-11  (via drill 0.51)
  Top 0.254: R48.1 C48.1 88.92,87.25 v91.19,87.25
  Bottom 0.254: JP68.1 93.98,81.53 93.98,85.47 92.2,87.25 v91.19,87.25
A2SEN  (via drill 0.51)
  Top 0.254: v1.27,36.07 1.5,36.3 AJ2.RSH
  Bottom 0.254: v1.27,36.07 1.27,33.53 2.54,32.26 12.7,32.26 13.97,30.99 13.97,10.67 15.24,9.4 15.24,6.86 JP2.2
A2SEN1  (via drill 0.51)
  Top 0.254: v26.67,36.07 26.9,36.3 AJ4.RSH
  Bottom 0.254: v26.67,36.07 26.67,33.53 27.94,32.26 38.1,32.26 39.37,30.99 39.37,10.67 40.64,9.4 40.64,6.86 JP8.2
A2SEN2  (via drill 0.51)
  Top 0.254: v52.07,36.07 52.3,36.3 AJ6.RSH
  Bottom 0.254: v52.07,36.07 52.07,33.53 53.34,32.26 63.5,32.26 64.77,30.99 64.77,10.67 66.04,9.4 66.04,6.86 JP14.2
A2SEN3  (via drill 0.51)
  Top 0.254: v77.47,36.07 77.7,36.3 AJ8.RSH
  Bottom 0.254: v77.47,36.07 77.47,33.53 78.74,32.26 88.9,32.26 90.17,30.99 90.17,10.67 91.44,9.4 91.44,6.86 JP20.2
A2SEN4  (via drill 0.51)
  Top 0.254: v1.27,73.41 1.5,73.64 AJ10.RSH
  Bottom 0.254: v1.27,73.41 1.27,70.87 2.54,69.6 12.7,69.6 13.97,68.33 13.97,48.01 15.24,46.74 15.24,44.2 JP26.2
A2SEN5  (via drill 0.51)
  Top 0.254: v26.67,73.41 26.9,73.64 AJ12.RSH
  Bottom 0.254: v26.67,73.41 26.67,70.87 27.94,69.6 38.1,69.6 39.37,68.33 39.37,48.01 40.64,46.74 40.64,44.2 JP32.2
A2SEN6  (via drill 0.51)
  Top 0.254: v52.07,73.41 52.3,73.64 AJ14.RSH
  Bottom 0.254: v52.07,73.41 52.07,70.87 53.34,69.6 63.5,69.6 64.77,68.33 64.77,48.01 66.04,46.74 66.04,44.2 JP38.2
A2SEN7  (via drill 0.51)
  Top 0.254: v77.47,73.41 77.7,73.64 AJ16.RSH
  Bottom 0.254: v77.47,73.41 77.47,70.87 78.74,69.6 88.9,69.6 90.17,68.33 90.17,48.01 91.44,46.74 91.44,44.2 JP44.2
A2SEN8  (via drill 0.51)
  Top 0.254: v1.27,110.74 1.5,110.97 AJ18.RSH
  Bottom 0.254: v1.27,110.74 1.27,108.2 2.54,106.93 12.7,106.93 13.97,105.66 13.97,85.34 15.24,84.07 15.24,81.53 JP50.2
A2SEN9  (via drill 0.51)
  Top 0.254: v26.67,110.74 26.9,110.97 AJ20.RSH
  Bottom 0.254: v26.67,110.74 26.67,108.2 27.94,106.93 38.1,106.93 39.37,105.66 39.37,85.34 40.64,84.07 40.64,81.53 JP56.2
A2SEN10  (via drill 0.51)
  Top 0.254: v52.07,110.74 52.3,110.97 AJ22.RSH
  Bottom 0.254: v52.07,110.74 52.07,108.2 53.34,106.93 63.5,106.93 64.77,105.66 64.77,85.34 66.04,84.07 66.04,81.53 JP62.2
A2SEN11  (via drill 0.51)
  Top 0.254: v77.47,110.74 77.7,110.97 AJ24.RSH
  Bottom 0.254: v77.47,110.74 77.47,108.2 78.74,106.93 88.9,106.93 90.17,105.66 90.17,85.34 91.44,84.07 91.44,81.53 JP68.2
GND  (via drill 0.51)
  other vias: 4.7,20.95 10.16,17.78
  pour Top (isolate 0.305): 0,4.32 0,41.15 20.32,41.15 20.32,4.32
  pour Bottom: 0,4.32 0,41.15 20.32,41.15 20.32,4.32
GND1  (via drill 0.51)
  other vias: 30.1,20.95 35.56,17.78
  pour Top (isolate 0.305): 25.4,4.32 25.4,41.15 45.72,41.15 45.72,4.32
  pour Bottom: 25.4,4.32 25.4,41.15 45.72,41.15 45.72,4.32
GND2  (via drill 0.51)
  other vias: 55.5,20.95 60.96,17.78
  pour Top (isolate 0.305): 50.8,4.32 50.8,41.15 71.12,41.15 71.12,4.32
  pour Bottom: 50.8,4.32 50.8,41.15 71.12,41.15 71.12,4.32
GND3  (via drill 0.51)
  other vias: 80.9,20.95 86.36,17.78
  pour Top (isolate 0.305): 76.2,4.32 76.2,41.15 96.52,41.15 96.52,4.32
  pour Bottom: 76.2,4.32 76.2,41.15 96.52,41.15 96.52,4.32
GND4  (via drill 0.51)
  other vias: 4.7,58.29 10.16,55.12
  pour Top (isolate 0.305): 0,41.66 0,78.49 20.32,78.49 20.32,41.66
  pour Bottom: 0,41.66 0,78.49 20.32,78.49 20.32,41.66
GND5  (via drill 0.51)
  other vias: 30.1,58.29 35.56,55.12
  pour Top (isolate 0.305): 25.4,41.66 25.4,78.49 45.72,78.49 45.72,41.66
  pour Bottom: 25.4,41.66 25.4,78.49 45.72,78.49 45.72,41.66
GND6  (via drill 0.51)
  other vias: 55.5,58.29 60.96,55.12
  pour Top (isolate 0.305): 50.8,41.66 50.8,78.49 71.12,78.49 71.12,41.66
  pour Bottom: 50.8,41.66 50.8,78.49 71.12,78.49 71.12,41.66
GND7  (via drill 0.51)
  other vias: 80.9,58.29 86.36,55.12
  pour Top (isolate 0.305): 76.2,41.66 76.2,78.49 96.52,78.49 96.52,41.66
  pour Bottom: 76.2,41.66 76.2,78.49 96.52,78.49 96.52,41.66
GND8  (via drill 0.51)
  other vias: 4.7,95.63 10.16,92.46
  pour Top (isolate 0.305): 0,78.99 0,115.82 20.32,115.82 20.32,78.99
  pour Bottom: 0,78.99 0,115.82 20.32,115.82 20.32,78.99
GND9  (via drill 0.51)
  other vias: 30.1,95.63 35.56,92.46
  pour Top (isolate 0.305): 25.4,78.99 25.4,115.82 45.72,115.82 45.72,78.99
  pour Bottom: 25.4,78.99 25.4,115.82 45.72,115.82 45.72,78.99
GND10  (via drill 0.51)
  other vias: 55.5,95.63 60.96,92.46
  pour Top (isolate 0.305): 50.8,78.99 50.8,115.82 71.12,115.82 71.12,78.99
  pour Bottom: 50.8,78.99 50.8,115.82 71.12,115.82 71.12,78.99
GND11  (via drill 0.51)
  other vias: 80.9,95.63 86.36,92.46
  pour Top (isolate 0.305): 76.2,78.99 76.2,115.82 96.52,115.82 96.52,78.99
  pour Bottom: 76.2,78.99 76.2,115.82 96.52,115.82 96.52,78.99
N$1
  Top 0.254: R3.2 11.43,17.4 12.06,18.03 12.7,18.03 13.08,18.41 13.08,24.13 7.62,29.59 7.62,37.34 6.73,38.23 4.32,38.23 AJ2.RING
N$2
  Top 0.254: AJ2.TIP 11.68,31.33 11.68,28.07 13.72,26.03 13.72,17.91 12.7,16.89 R4.2
N$3
  Top 0.254: R1.2 7.62,25.27 6.1,26.8 4.32,26.8 AJ1.RING
N$4
  Top 0.254: R2.2 8.89,19.18 9.65,19.94 11.68,19.94 AJ1.TIP
N$5
  Top 0.254: R7.2 36.83,17.4 37.47,18.03 38.1,18.03 38.48,18.41 38.48,24.13 33.02,29.59 33.02,37.34 32.13,38.23 29.72,38.23 AJ4.RING
N$6
  Top 0.254: AJ4.TIP 37.08,31.33 37.08,28.07 39.12,26.03 39.12,17.91 38.1,16.89 R8.2
N$7
  Top 0.254: R5.2 33.02,25.27 31.5,26.8 29.72,26.8 AJ3.RING
N$8
  Top 0.254: R6.2 34.29,19.18 35.05,19.94 37.08,19.94 AJ3.TIP
N$9
  Top 0.254: R11.2 62.23,17.4 62.87,18.03 63.5,18.03 63.88,18.41 63.88,24.13 58.42,29.59 58.42,37.34 57.53,38.23 55.12,38.23 AJ6.RING
N$10
  Top 0.254: AJ6.TIP 62.48,31.33 62.48,28.07 64.52,26.03 64.52,17.91 63.5,16.89 R12.2
N$11
  Top 0.254: R9.2 58.42,25.27 56.9,26.8 55.12,26.8 AJ5.RING
N$12
  Top 0.254: R10.2 59.69,19.18 60.45,19.94 62.48,19.94 AJ5.TIP
N$13
  Top 0.254: R15.2 87.63,17.4 88.27,18.03 88.9,18.03 89.28,18.41 89.28,24.13 83.82,29.59 83.82,37.34 82.93,38.23 80.52,38.23 AJ8.RING
N$14
  Top 0.254: AJ8.TIP 87.88,31.33 87.88,28.07 89.92,26.03 89.92,17.91 88.9,16.89 R16.2
N$15
  Top 0.254: R13.2 83.82,25.27 82.3,26.8 80.52,26.8 AJ7.RING
N$16
  Top 0.254: R14.2 85.09,19.18 85.85,19.94 87.88,19.94 AJ7.TIP
N$17
  Top 0.254: R19.2 11.43,54.74 12.06,55.37 12.7,55.37 13.08,55.75 13.08,61.47 7.62,66.93 7.62,74.68 6.73,75.56 4.32,75.56 AJ10.RING
N$18
  Top 0.254: AJ10.TIP 11.68,68.67 11.68,65.41 13.72,63.37 13.72,55.24 12.7,54.23 R20.2
N$19
  Top 0.254: R17.2 7.62,62.61 6.1,64.14 4.32,64.14 AJ9.RING
N$20
  Top 0.254: R18.2 8.89,56.52 9.65,57.28 11.68,57.28 AJ9.TIP
N$21
  Top 0.254: R23.2 36.83,54.74 37.47,55.37 38.1,55.37 38.48,55.75 38.48,61.47 33.02,66.93 33.02,74.68 32.13,75.56 29.72,75.56 AJ12.RING
N$22
  Top 0.254: AJ12.TIP 37.08,68.67 37.08,65.41 39.12,63.37 39.12,55.24 38.1,54.23 R24.2
N$23
  Top 0.254: R21.2 33.02,62.61 31.5,64.14 29.72,64.14 AJ11.RING
N$24
  Top 0.254: R22.2 34.29,56.52 35.05,57.28 37.08,57.28 AJ11.TIP
N$25
  Top 0.254: R27.2 62.23,54.74 62.87,55.37 63.5,55.37 63.88,55.75 63.88,61.47 58.42,66.93 58.42,74.68 57.53,75.56 55.12,75.56 AJ14.RING
N$26
  Top 0.254: AJ14.TIP 62.48,68.67 62.48,65.41 64.52,63.37 64.52,55.24 63.5,54.23 R28.2
N$27
  Top 0.254: R25.2 58.42,62.61 56.9,64.14 55.12,64.14 AJ13.RING
N$28
  Top 0.254: R26.2 59.69,56.52 60.45,57.28 62.48,57.28 AJ13.TIP
N$29
  Top 0.254: R31.2 87.63,54.74 88.27,55.37 88.9,55.37 89.28,55.75 89.28,61.47 83.82,66.93 83.82,74.68 82.93,75.56 80.52,75.56 AJ16.RING
N$30
  Top 0.254: AJ16.TIP 87.88,68.67 87.88,65.41 89.92,63.37 89.92,55.24 88.9,54.23 R32.2
N$31
  Top 0.254: R29.2 83.82,62.61 82.3,64.14 80.52,64.14 AJ15.RING
N$32
  Top 0.254: R30.2 85.09,56.52 85.85,57.28 87.88,57.28 AJ15.TIP
N$33
  Top 0.254: R35.2 11.43,92.08 12.06,92.71 12.7,92.71 13.08,93.09 13.08,98.81 7.62,104.27 7.62,112.01 6.73,112.9 4.32,112.9 AJ18.RING
N$34
  Top 0.254: AJ18.TIP 11.68,106.01 11.68,102.74 13.72,100.71 13.72,92.58 12.7,91.57 R36.2
N$35
  Top 0.254: R33.2 7.62,99.95 6.1,101.47 4.32,101.47 AJ17.RING
N$36
  Top 0.254: R34.2 8.89,93.85 9.65,94.61 11.68,94.61 AJ17.TIP
N$37
  Top 0.254: R39.2 36.83,92.08 37.47,92.71 38.1,92.71 38.48,93.09 38.48,98.81 33.02,104.27 33.02,112.01 32.13,112.9 29.72,112.9 AJ20.RING
N$38
  Top 0.254: AJ20.TIP 37.08,106.01 37.08,102.74 39.12,100.71 39.12,92.58 38.1,91.57 R40.2
N$39
  Top 0.254: R37.2 33.02,99.95 31.5,101.47 29.72,101.47 AJ19.RING
N$40
  Top 0.254: R38.2 34.29,93.85 35.05,94.61 37.08,94.61 AJ19.TIP
N$41
  Top 0.254: R43.2 62.23,92.08 62.87,92.71 63.5,92.71 63.88,93.09 63.88,98.81 58.42,104.27 58.42,112.01 57.53,112.9 55.12,112.9 AJ22.RING
N$42
  Top 0.254: AJ22.TIP 62.48,106.01 62.48,102.74 64.52,100.71 64.52,92.58 63.5,91.57 R44.2
N$43
  Top 0.254: R41.2 58.42,99.95 56.9,101.47 55.12,101.47 AJ21.RING
N$44
  Top 0.254: R42.2 59.69,93.85 60.45,94.61 62.48,94.61 AJ21.TIP
N$45
  Top 0.254: R47.2 87.63,92.08 88.27,92.71 88.9,92.71 89.28,93.09 89.28,98.81 83.82,104.27 83.82,112.01 82.93,112.9 80.52,112.9 AJ24.RING
N$46
  Top 0.254: AJ24.TIP 87.88,106.01 87.88,102.74 89.92,100.71 89.92,92.58 88.9,91.57 R48.2
N$47
  Top 0.254: R45.2 83.82,99.95 82.3,101.47 80.52,101.47 AJ23.RING
N$48
  Top 0.254: R46.2 85.09,93.85 85.85,94.61 87.88,94.61 AJ23.TIP

## Text on the board
Bottom: v10 | v10 | v10 | v10 | v10 | v10 | v10 | v10 | v10 | v10 | v10 | v10
tPlace: A2 | A2 | A2 | A2 | Papilio | Audio Wing | Papilio | Audio Wing | Papilio | Audio Wing | Papilio | Audio Wing | A1 | A1 | A1 | A1 | A1+ | A1Sen | A1- | A2+ | A2Sen | A2- | A1+ | A1Sen | A1- | A2+ | A2Sen | A2- | A1+ | A1Sen | A1- | A2+ | A2Sen | A2- | A1+ | A1Sen | A1- | A2+ | A2Sen | A2- | A2 | A2 | A2 | A2 | Papilio | Audio Wing | Papilio | Audio Wing | Papilio | Audio Wing | Papilio | Audio Wing | A1 | A1 | A1 | A1 | A1+ | A1Sen | A1- | A2+ | A2Sen | A2- | A1+ | A1Sen | A1- | A2+ | A2Sen | A2- | A1+ | A1Sen | A1- | A2+ | A2Sen | A2- | A1+ | A1Sen | A1- | A2+ | A2Sen | A2- | A2 | A2 | A2 | A2 | Papilio | Audio Wing | Papilio | Audio Wing | Papilio | Audio Wing | Papilio | Audio Wing | A1 | A1 | A1 | A1 | A1+ | A1Sen | A1- | A2+ | A2Sen | A2- | A1+ | A1Sen | A1- | A2+ | A2Sen | A2- | A1+ | A1Sen | A1- | A2+ | A2Sen | A2- | A1+ | A1Sen | A1- | A2+ | A2Sen | A2-
bPlace: Audio Wing | Audio Wing | Audio Wing | Audio Wing | Papilio | Papilio | Papilio | Papilio | 3.3V | 2.5V | 3.3V | 2.5V | 3.3V | 2.5V | 3.3V | 2.5V | GND | GND | GND | GND | 5V | 5V | 5V | 5V | Audio Wing | Audio Wing | Audio Wing | Audio Wing | Papilio | Papilio | Papilio | Papilio | 3.3V | 2.5V | 3.3V | 2.5V | 3.3V | 2.5V | 3.3V | 2.5V | GND | GND | GND | GND | 5V | 5V | 5V | 5V | Audio Wing | Audio Wing | Audio Wing | Audio Wing | Papilio | Papilio | Papilio | Papilio | 3.3V | 2.5V | GND | 3.3V | 2.5V | GND | 3.3V | 2.5V | GND | 3.3V | 2.5V | GND | 5V | 5V | 5V | 5V